# Altium PCB HVSUP_ISOL.PCBDOC (part 1 of 2)
Units mm, origin at the board's own origin, x right, y up, seen from the top; angles counter-clockwise.
Board outline 222.63 x 100.1 mm, 4 copper layers (Top, GP1(GND), L3, Bot), stack 1.648 mm thick; 144 components, 102 nets, 508 pads, 186 vias.
Unrouted connection lines stored in the file: 240.
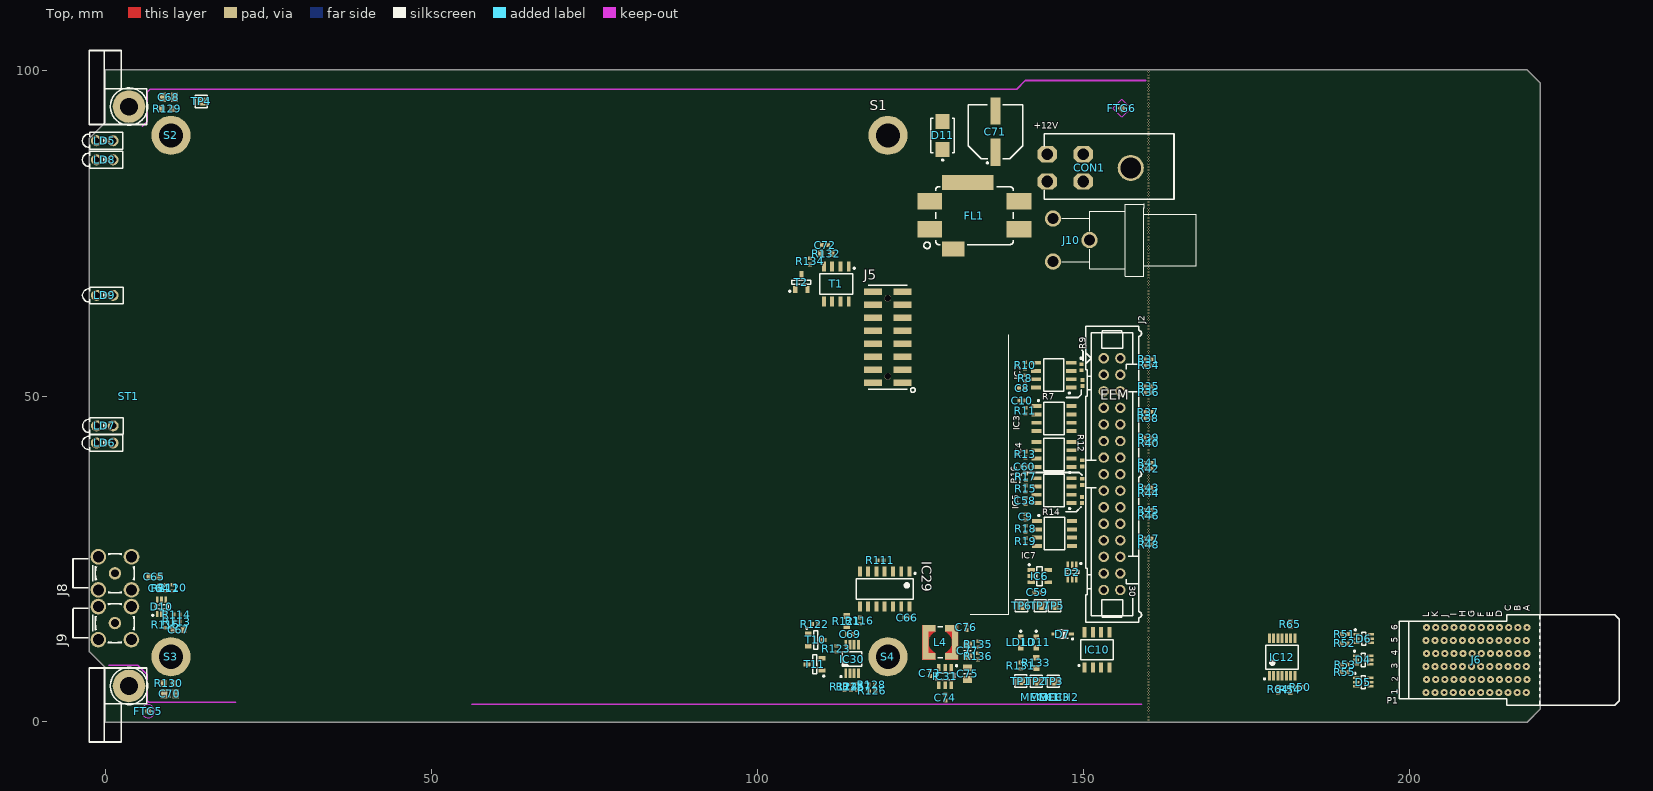
[diagram p0: Top view]
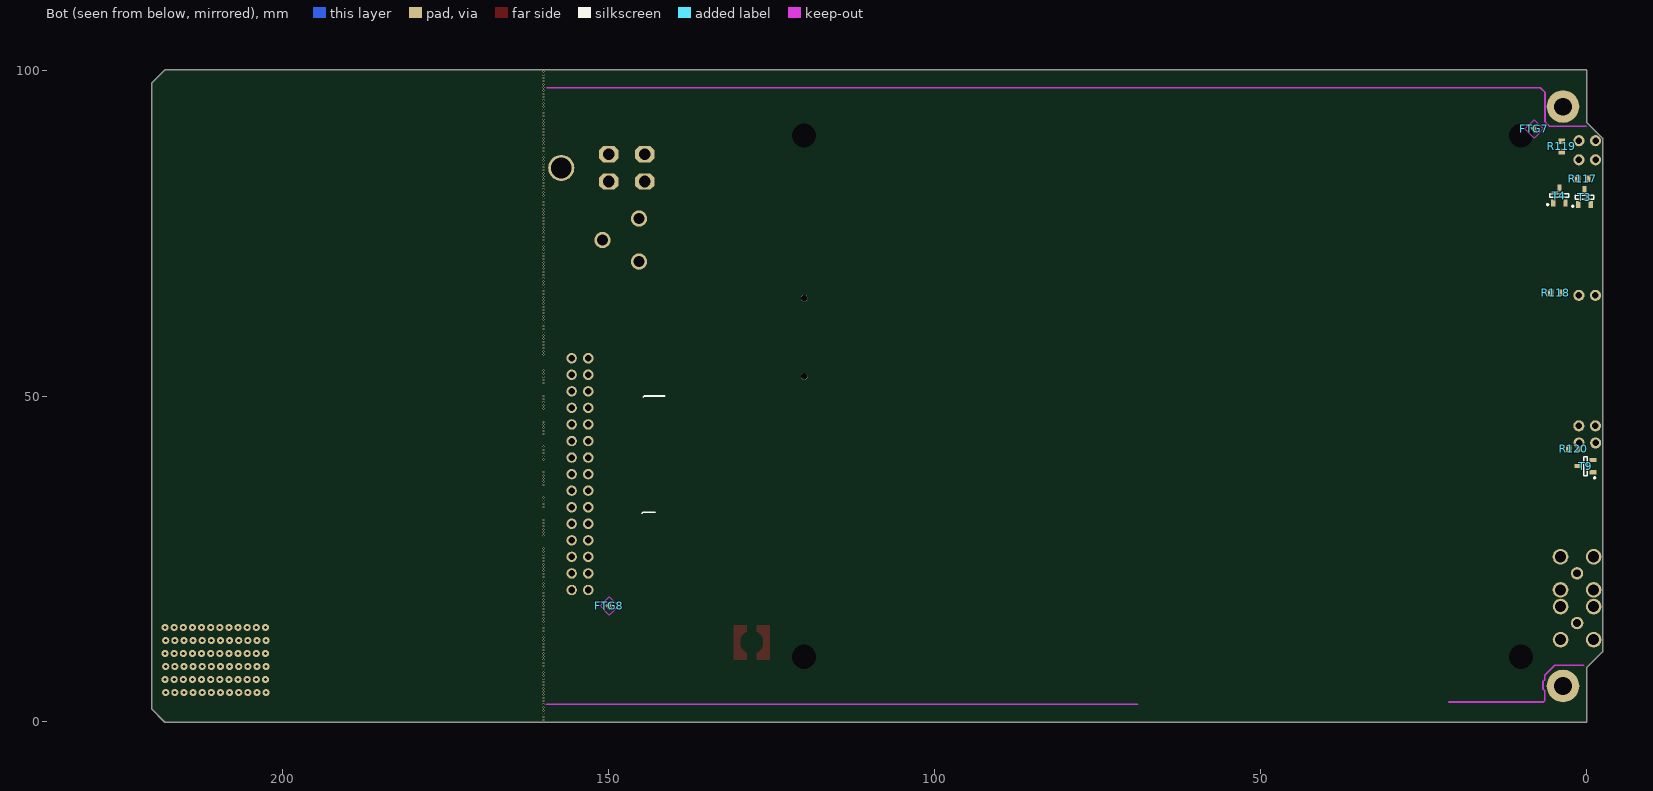
[diagram p1: Bot view, seen from below]
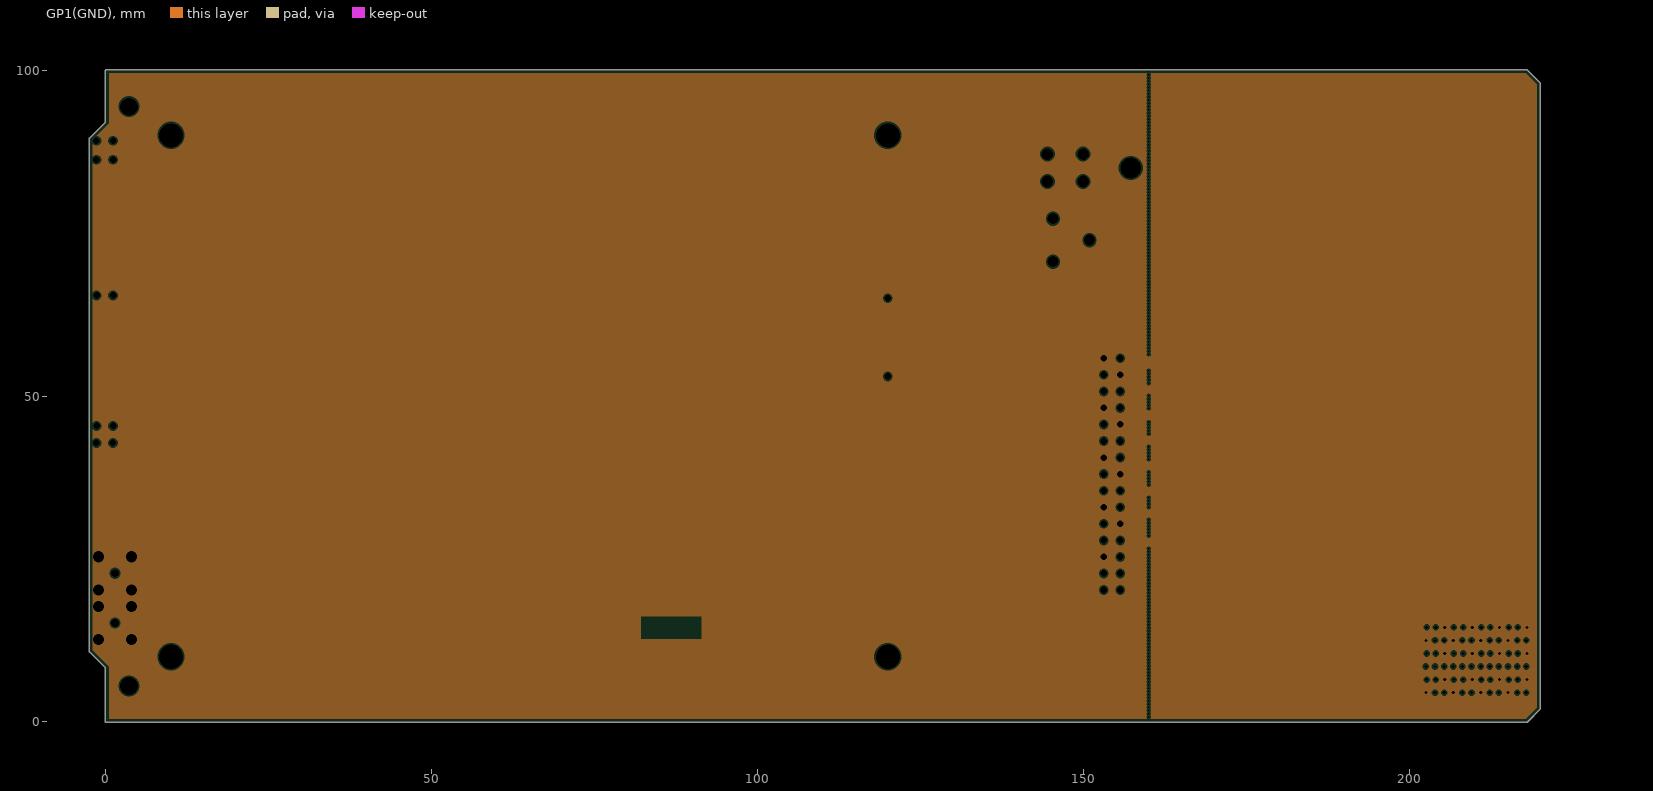
[diagram p2: GP1(GND), clearances drawn from the general rule]

## Layer stack, top to bottom
TopSolder: solder mask 0.0102, Solder Resist, Dk 3.5
Top: signal copper 0.058
Dielectric1: core 0.18, FR-4, Dk 4.2
GP1(GND): plane copper 0.036, net GND
Dielectric 3: prepreg 1.1, FR-4, Dk 4.2
L3: signal copper 0.036
Dielectric2: core 0.18, FR-4, Dk 4.2
Bot: signal copper 0.058
BottomSolder: solder mask 0.0102, Solder Resist, Dk 3.5

## Board outline
-2.54,10.82 -2.54,15.138 cw(c-2.489,15.138) -2.539,15.142 cw(c-2.489,15.145) -2.54,15.145 -2.54,22.645 -2.54,89.511 cw(c-2.489,89.511) -2.525,89.547 -0.05,92.021 -0.05,100 cw(c0,100) 0,100.05 159.99,100.05 cw(c159.995,100) 159.995,100.05 218.037,100.05 cw(c218.039,100) 218.075,100.036 220.074,98.036 cw(c220.039,98) 220.089,98 220.089,2 cw(c220.039,2) 220.074,1.964 218.075,-0.035 cw(c218.039,0) 218.039,-0.05 0,-0.05 cw(c0,0) -0.05,0 -0.05,8.299 -2.525,10.773 cw(c-2.489,10.809) -2.539,10.815 cw(c-2.489,10.82)

## Design rules (kind name [scope] priority, off if disabled: settings)
AcuteAngle [All] p1: minimum=6.00000000000000E+0001 checktracksonly=FALSE
BoardOutlineClearance [not (OnLayer('TopOverlay')  or  OnLayer('BottomOverlay') )] p1: gap=0.254 ignorepadtopadclearanceinfootprint=FALSE except(0: Arc-SplitContinuation Track-SplitContinuation SMDPad-SplitContinuation THPad-SplitContinuation Via-SplitContinuation Fill-SplitContinuation Poly-SplitContinuation Region-SplitContinuation Text-SplitContinuation)
Clearance Clearance_HV [InNetClass('HV') vs not InNetClass('HV')] p1: gap=1 ignorepadtopadclearanceinfootprint=FALSE
Clearance Clearance_balancing [InNamedPolygon('balancing')            or InNamedPolygon('balancing_top')] p2: gap=0.3 ignorepadtopadclearanceinfootprint=FALSE
Clearance Clearance_DIFF [(InDifferentialPairClass('All Differential Pairs'))] p3: gap=0.127 ignorepadtopadclearanceinfootprint=FALSE except(0: Arc-Hole Track-Hole SMDPad-Hole THPad-Hole Via-Hole Fill-Hole Poly-Hole Region-Hole Text-Hole; 0.254: Arc-Poly Track-Poly SMDPad-Poly THPad-Poly Via-Poly Fill-Poly Poly-Poly Poly-Region Poly-Text)
Clearance [All] p4: gap=0.127 ignorepadtopadclearanceinfootprint=FALSE except(0: Arc-Hole Track-Hole SMDPad-Hole THPad-Hole Via-Hole Fill-Hole Poly-Hole Region-Hole Text-Hole; 0.381: Arc-Poly Track-Poly SMDPad-Poly THPad-Poly Via-Poly Fill-Poly Poly-Poly)
ComponentClearance [All] p1 off: gap=0.254 collisioncheckmode=3 verticalgap=0.254 showdistances=FALSE
DiffPairsRouting [All] p1: maxlimit=0.178 minlimit=0.152 mostfreqgap=0.152 toplayer_minwidth=0.127 toplayer_maxwidth=0.152 toplayer_prefwidth=0.152 midlayer1_minwidth=0.127 midlayer1_maxwidth=0.152 midlayer1_prefwidth=0.152 bottomlayer_minwidth=0.127 bottomlayer_maxwidth=0.152 bottomlayer_prefwidth=0.152 maxuncoupledlength=12.7
FabricationTestPointUsage TestPointUsage [All] p1: valid=0 allowmultiple=FALSE
FabricationTestpoint Testpoint [All] p1: side=3 testpointundercomponent=TRUE minsize=1.016 maxsize=2.54 preferedsize=1.524 minholesize=0.508 maxholesize=1.016 preferedholesize=0.813 testpointgrid=0.025 allowsidetop=TRUE allowsidebottom=TRUE usegrid=TRUE gridtolerance=0
Height [All] p1 off: minheight=0 maxheight=25.4 prefheight=12.7
HoleSize [All] p1: absolutevalues=TRUE maxlimit=3.81 minlimit=0.025 maxpercent=80.000 minpercent=20.000
HoleToHoleClearance [All] p1: gap=0.025 allowstackedmicrovias=TRUE
MinimumSolderMaskSliver [All] p1: minsoldermaskwidth=0
PlaneClearance PlaneClearance_HV [InNetClass('HV')] p1: clearance=1
PlaneClearance [All] p2: clearance=0.254
PlaneConnect [All] p1: planeconnectstyle=Direct reliefexpansion=0.508 reliefentries=4 reliefconductorwidth=0.254 reliefairgap=0.254
PolygonConnect PolygonConnect_pad [(InPadClass('All Pads'))] p1: connectstyle=Relief reliefconductorwidth=0.254 reliefentries=4 polygonreliefangle="90 Angle" airgapwidth=0.254
PolygonConnect [All] p2: connectstyle=Direct reliefconductorwidth=0.254 reliefentries=4 polygonreliefangle="45 Angle" airgapwidth=0.254
RoomDefinition HVSUP_ISOL [InComponentClass('HVSUP_ISOL')] p1: confinementstyle=ConfineIn formatcopy=TRUE lockcomponents=FALSE outline -101.6,-152.4 -50.8,-152.4 -50.8,-127 -101.6,-127
RoomDefinition U_DIOT_Connectors [InComponentClass('U_DIOT_Connectors')] p2: confinementstyle=ConfineIn formatcopy=TRUE lockcomponents=FALSE outline 161.149,1.6 336.649,1.6 336.649,10.6 161.149,10.6
RoomDefinition U_Supply_HV_ISOL [InComponentClass('U_Supply_HV_ISOL')] p3: confinementstyle=ConfineIn formatcopy=TRUE lockcomponents=FALSE outline 161.138,126.414 497.004,126.414 497.004,158.265 161.138,158.265
RoomDefinition EEM_connector [InComponentClass('EEM_connector')] p4 off: confinementstyle=ConfineIn formatcopy=TRUE lockcomponents=FALSE outline 145.554,8.308 157.75,8.308 157.75,58.925 145.554,58.925
RoutingVias "Schematic Routing Via Style" [InNetClass('Hpower')] p1: holewidth=0.5 width=0.7 viastyle="Through Hole" minholewidth=0.5 minwidth=0.7 maxholewidth=0.711 maxwidth=1.27
RoutingVias [All] p2: holewidth=0.2 width=0.5 viastyle="Through Hole" minholewidth=0.2 minwidth=0.5 maxholewidth=0.711 maxwidth=1.27
SilkToSilkClearance [All] p1: silktosilkclearance=0
SilkToSolderMaskClearance SilkscreenOverComponentPads [IsPad] p1: minsilkscreentomaskgap=0 clearancetoexposedcopper=TRUE
SolderMaskExpansion [All] p1: expansion=0.051 istentingtop=FALSE
Width "Schematic Width Constraint" [InNetClass('Hpower')] p1: maxlimit=1.27 minlimit=0.381 preferedwidth=0.508
Width Z50R [InNetClass('SPI')] p2: maxlimit=0.298 minlimit=0.221 preferedwidth=0.298 toplayer_minwidth=0.298 midlayer1_maxwidth=0.221 midlayer1_prefwidth=0.221 bottomlayer_minwidth=0.298 impedanceprofiledriven=TRUE minimp=50.000000 maximp=50.000000 favimp=50.000000
Width [All] p3: maxlimit=1.27 minlimit=0.127 preferedwidth=0.127
18 further rules are at their usual default settings.

## Classes and differential pairs
net class BP_IO.LVDS_P[0..7]: BP_IO.LVDS_P0 BP_IO.LVDS_P1 BP_IO.LVDS_P2 BP_IO.LVDS_P3 BP_IO.LVDS_P4 BP_IO.LVDS_P5 BP_IO.LVDS_P6 BP_IO.LVDS_P7
net class BP_IO.LVDS_N[0..7]: BP_IO.LVDS_N0 BP_IO.LVDS_N1 BP_IO.LVDS_N2 BP_IO.LVDS_N3 BP_IO.LVDS_N4 BP_IO.LVDS_N5 BP_IO.LVDS_N6 BP_IO.LVDS_N7
component class U_DIOT_Connectors: D4 D5 D6 IC12 J6 R50 R51 R52 R53 R54 R55 R64 R65
net class Hpower: GNDF P12V0F
component class U_Supply_HV_ISOL: C71 C72 C73 C74 C75 C76 C77 CON1 D7 D11 FL1 IC31 J10 L4 LD10 LD11 R131 R132 R133 R134 R135 R136 T1 T2 TP1 TP2 TP3 TP4
component class EEM_connector: C8 C9 C10 C58 C59 C60 D2 IC2 IC3 IC4 IC5 IC6 IC7 IC10 J2 R7 R8 R9 R10 R11 R12 R13 R14 R15 R16 R17 R18 R19 R31 R34 R35 R36 R37 R38 R39 R40 R41 R42 R43 R44 R45 R46 R47 R48 TP5 TP6 TP7
component class HVSUP_ISOL: C64 C65 C66 C67 C68 C69 C70 D10 FTG5 FTG6 FTG7 FTG8 IC29 IC30 J5 J8 J9 LD5 LD6 LD7 LD8 LD9 MECH1 MECH2 MECH3 R110 R111 R112 R113 R114 R115 R116 R117 R118 R119 R120 R121 R122 R123 R124 R125 R126 R127 R128 R129 R130 S1 S2 S3 S4 ST1 T3 T4 T9 T10 T11
differential pair BP_IO.LVDS4: +BP_IO.LVDS_P4 -BP_IO.LVDS_N4
differential pair BP_IO.LVDS3: +BP_IO.LVDS_P3 -BP_IO.LVDS_N3
differential pair BP_IO.LVDS2: +BP_IO.LVDS_P2 -BP_IO.LVDS_N2
differential pair BP_IO.LVDS1: +BP_IO.LVDS_P1 -BP_IO.LVDS_N1
differential pair BP_IO.LVDS0: +BP_IO.LVDS_P0 -BP_IO.LVDS_N0
differential pair PE_CLK.CLK: +PE_CLK.CLK_P -PE_CLK.CLK_N
differential pair BP_IO.LVDS7: +BP_IO.LVDS_P7 -BP_IO.LVDS_N7
differential pair BP_IO.LVDS6: +BP_IO.LVDS_P6 -BP_IO.LVDS_N6
differential pair BP_IO.LVDS5: +BP_IO.LVDS_P5 -BP_IO.LVDS_N5
differential pair LVDS7: +LVDS7_P -LVDS7_N
differential pair LVDS6: +LVDS6_P -LVDS6_N
differential pair LVDS5: +LVDS5_P -LVDS5_N
differential pair LVDS4: +LVDS4_P -LVDS4_N
differential pair LVDS3: +LVDS3_P -LVDS3_N
differential pair LVDS2: +LVDS2_P -LVDS2_N
differential pair LVDS1: +LVDS1_P -LVDS1_N
differential pair LVDS0: +LVDS0_P -LVDS0_N

## Components (designator, comment, footprint, x,y, rotation, side; value= is the part's Value field where it differs from the comment)
C8 "100nF" CAPC1005X55N 140.576,51.206 r0 top
C9 "100nF" CAPC1005X55N 141.127,31.472 r270 top
C10 "100nF" CAPC1005X55N 140.626,49.296 r0 top
C58 "100nF" CAPC1005X55N 141.086,33.921 r270 top
C59 "100nF" CAPC1005X55N 142.925,19.875 r0 top
C60 "100nF" CAPC1005X55N 140.985,39.176 r0 top
C64 "100nF" CAPC1005X55N 8.2,20.52 r270 top
C65 "Undefined" CAPC1608X90N 7.45,22.275 r0 top
C66 "100nF" CAPC1005X55N 122.975,16 r0 top
C67 "Undefined" CAPC1608X90N 11.175,14.125 r180 top
C68 "Undefined" CAPC2012X135N 9.625,95.85 r0 top
C69 "100nF" CAPC1005X55N 114.2,13.45 r180 top
C70 "Undefined" CAPC2012X135N 9.825,4.314 r0 top
C71 "220uF" CAPAE830X620N 136.5,90.55 r90 top
C72 "1uF" CAPC1005X55N 110.35,73.17 r0 top
C73 "100nF" CAPC1005X55N 126.425,7.47 r90 top
C74 "100nF" CAPC1005X55N 128.801,3.725 r90 top
C75 "22uF" CAPC2012X135N 132.234,7.407 r270 top
C76 "100nF" CAPC1005X55N 132.033,14.536 r270 top
C77 "22uF" CAPC2012X135N 132.234,10.891 r90 top
CON1 "MRX56904CV" MRX56904CV 149.95,87.1 r90 top
D2 "DRTR5V0U4S-7" SOT65P210X110-6N 148.248,23 r270 top
D4 "PESD3V3L5UY" SOT65P210X110-6N 192.9,9.5 r0 top
D5 "PESD3V3L5UY" SOT65P210X110-6N 192.95,6.1 r0 top
D6 "PESD3V3L5UY" SOT65P210X110-6N 193,12.775 r0 top
D7 "BAT165" SOD2512X110N 146.825,13.475 r180 top
D10 "DRTR5V0U4S-7" SOT65P210X110-6N 8.55,17.65 r90 top
D11 "SMBJ15A" DIOM5336X265N 128.4,90 r90 top
FL1 "10A/50VDC" FIL_MURATA_BNX02 133.275,77.675 r180 top
FTG5 "Use only in PCB" FIDUCIAL_TOP_C100-200 6.5,1.646 r90 top
FTG6 "Use only in PCB" FIDUCIAL_TOP_S100-200 155.9,94.15 r90 top
FTG7 "Use only in PCB" FIDUCIAL_TOP_S100-200 8,91 r90 bottom
FTG8 "Use only in PCB" FIDUCIAL_TOP_S100-200 149.86,17.805 r90 bottom
IC2 "FIN1028MX" SOIC127P600X175-8N 145.432,53.206 r180 top
IC3 "FIN1027AMX" SOIC127P600X175-8N 145.483,46.541 r0 top
IC4 "FIN1028MX" SOIC127P600X175-8N 145.493,41.041 r180 top
IC5 "FIN1028MX" SOIC127P600X175-8N 145.483,35.485 r180 top
IC6 "24AA02E48T-I/OT" SOT95P280X145-5N 143.284,22.375 r0 top
IC7 "FIN1027AMX" SOIC127P600X175-8N 145.543,28.906 r0 top
IC10 "24AA025E48-I/SN" SOIC127P600X175-8N 152.075,11.05 r90 top
IC12 "74HC4066PW" SOP65P640X110-14N 180.475,9.95 r90 top
IC29 "SN74LVC14AD" SOIC127P600X175-14N 119.5,20.4 r270 top
IC30 "LM75AIMM/NOPB" SOP65P490X109-8N 114.5,9.65 r90 top
IC31 "AP62201WU-7" SOT95P280X100-6N 128.776,6.97 r270 top
J2 "IDC" 3M_N2530-6002RB 154.384,38.018 r270 top locked
J5 "PLMTD16S-CT or 87759-1650" 87759-1650 119.964,59.004 r90 top locked
J6 "P1" AMPHENOL_10052825-101LF 210.289,9.5 r90 top locked
J8 "MCX" AMPHENOL_919-383J-51A 1.4,22.8 r180 top
J9 "MCX" AMPHENOL_919-383J-51A 1.39,15.16 r180 top
J10 "Jack" SWITCHCRAFT_L712RA 145.325,70.625 r180 top
L4 "3.3uH" IND_WURTH_WE-TPC_4828 128.026,12.207 r0 top
LD5 "Green" LED_DIALIGHT_555-230 -1.436,89.169 r0 top
LD6 "Green" LED_DIALIGHT_555-230 -1.45,42.8 r0 top
LD7 "Red" LED_DIALIGHT_555-200 -1.415,45.425 r0 top
LD8 "Green" LED_DIALIGHT_555-230 -1.436,86.25 r0 top
LD9 "Green" LED_DIALIGHT_555-230 -1.424,65.445 r0 top
LD10 "Green" LED_KINGBRIGHT_KPH-1608CGCK 140.375,12.214 r270 top
LD11 "Green" LED_KINGBRIGHT_KPH-1608CGCK 142.75,12.214 r270 top
MECH1 "R317580000" GENERIC_MECH 143.479,3.822 r90 top
MECH2 "R317580000" GENERIC_MECH 146.273,3.782 r90 top
MECH3 "R317580000" GENERIC_MECH 144.876,3.782 r90 top
R7 "100" RESC1005X40N 149.86,51.999 r90 top
R8 "100" RESC1005X40N 141.035,52.706 r270 top
R9 "100" RESC1005X40N 149.732,54.413 r90 top
R10 "100" RESC1005X40N 141.035,54.706 r270 top
R11 "100" RESC1005X40N 141.086,47.741 r270 top
R12 "100" RESC1005X40N 149.811,39.676 r90 top
R13 "100" RESC1005X40N 141.086,41.041 r270 top
R14 "100" RESC1005X40N 149.783,34.041 r90 top
R15 "100" RESC1005X40N 141.126,35.798 r270 top
R16 "100" RESC1005X40N 149.811,36.835 r90 top
R17 "1k" RESC1005X40N 141.151,37.605 r270 top
R18 "100" RESC1005X40N 141.111,29.614 r270 top
R19 "100" RESC1005X40N 141.111,27.742 r90 top
R31 "0" RESC1005X40N 159.995,55.616 r0 top
R34 "0" RESC1005X40N 159.995,54.706 r0 top
R35 "0" RESC1005X40N 159.995,51.481 r0 top
R36 "0" RESC1005X40N 159.995,50.575 r0 top
R37 "0" RESC1005X40N 159.975,47.525 r0 top
R38 "0" RESC1005X40N 159.975,46.6 r0 top
R39 "0" RESC1005X40N 160,43.625 r0 top
R40 "0" RESC1005X40N 160,42.75 r0 top
R41 "0" RESC1005X40N 159.995,39.75 r0 top
R42 "0" RESC1005X40N 160,38.875 r0 top
R43 "0" RESC1005X40N 160,35.925 r0 top
R44 "0" RESC1005X40N 160,35.05 r0 top
R45 "0" RESC1005X40N 160,32.5 r0 top
R46 "0" RESC1005X40N 160,31.625 r0 top
R47 "0" RESC1005X40N 160,28.1 r0 top
R48 "0" RESC1005X40N 160,27.2 r0 top
R50 "200" RESC1005X40N 183.295,5.35 r180 top
R51 "22" RESC1005X40N 190.125,13.475 r0 top
R52 "22" RESC1005X40N 190.05,12.05 r0 top
R53 "22" RESC1005X40N 190.145,8.8 r0 top
R54 "22" RESC1005X40N 181.725,4.925 r270 top
R55 "22" RESC1005X40N 190.05,7.625 r0 top
R64 "10k" RESC1005X40N 179.85,5 r270 top
R65 "10k" RESC1005X40N 181.725,15 r90 top
R110 "51" RESC1005X40N 10.265,20.575 r90 top
R111 "51" RESC1005X40N 118.85,24.775 r0 top
R112 "51" RESC1005X40N 9.175,20.52 r270 top
R113 "51" RESC1005X40N 10.875,15.38 r0 top
R114 "10k" RESC1005X40N 10.875,16.45 r180 top
R115 "51" RESC1005X40N 9.175,14.91 r90 top
R116 "100" RESC1005X40N 115.69,15.54 r270 top
R117 "220" RESC1608X55N 0.55,83.35 r180 bottom
R118 "220" RESC1608X55N 4.659,65.85 r0 bottom
R119 "220" RESC1608X55N 3.759,88.294 r270 bottom
R120 "220" RESC1608X55N 1.875,41.875 r0 bottom
R121 "220" RESC1608X55N 113.65,15.475 r90 top
R122 "10k" RESC1005X40N 108.8,15 r180 top
R123 "10k" RESC1005X40N 112.075,11.22 r270 top
R124 "10k" RESC1005X40N 113.325,5.375 r270 top
R125 "10k" RESC1005X40N 114.3,5.375 r270 top
R126 "0" RESC1005X40N 117.6,4.75 r180 top
R127 "0" RESC1005X40N 115.275,5.375 r270 top
R128 "0" RESC1005X40N 117.52,5.7 r180 top
R129 "0" RESC1608X55N 9.414,94.075 r180 top
R130 "0" RESC1608X55N 9.675,5.95 r180 top
R131 "10k" RESC1005X40N 140.375,8.641 r270 top
R132 "100k" RESC1608X55N 110.525,71.845 r0 top
R133 "1k" RESC1608X55N 142.75,9.046 r90 top
R134 "10k" RESC1005X40N 108.075,70.67 r90 top
R135 "31k6" RESC1005X35N 133.858,11.909 r90 top
R136 "10k" RESC1005X40N 133.834,10.064 r90 top
S1 "9774030151" 9774030151 120,90 r0 top locked
S2 "9774030151" 9774030151 10,90 r0 top locked
S3 "9774030151" 9774030151 10,10 r0 top locked
S4 "9774030151" 9774030151 120,10 r0 top locked
ST1 "SCHROFF_PANEL_3U_4HP" SCHROFF_PANEL_3HP_4U 3.556,5.512 r0 top locked
T1 "SI4425DDY-T1-GE3" SOIC127P600X175-8N 112.075,67.195 r270 top
T2 "BSS138LT1G" SOT95P240X110-3N 106.725,67.47 r90 top
T3 "BSS138LT1G" SOT95P240X110-3N 0.254,80.512 r90 bottom
T4 "BSS138LT1G" SOT95P240X110-3N 4.109,80.762 r90 bottom
T9 "BSS138LT1G" SOT95P240X110-3N 0.1,39.25 r0 bottom
T10 "BSS138LT1G" SOT95P240X110-3N 108.925,12.575 r0 top
T11 "BSS138LT1G" SOT95P240X110-3N 108.75,8.825 r180 top
TP1 "Test Point" TPS127 140.375,6.275 r0 top
TP2 "Test Point" TPS127 142.75,6.244 r90 top
TP3 "Test Point" TPS127 145.359,6.244 r90 top
TP4 "Test Point" TPS127 14.65,95.2 r90 top
TP5 "Test Point" TPS127 145.543,17.805 r0 top
TP6 "Test Point" TPS127 140.496,17.805 r0 top
TP7 "Test Point" TPS127 143.384,17.805 r0 top

## Footprints (in the part's own frame and the unit in brackets; to place one, negate y for a bottom-side part, rotate by r counter-clockwise, add the part's x,y. Pads: shape width x height; smd on the part's side, far side on the other; paste and mask are expansions set on the pad)
3M_N2530-6002RB [mm] "30 Contacts - Straight .100\" x .100\" Low Profile Four-Wall Header"
  round 1.6 hole 1: 1(-17.78,-1.27) 2(-17.78,1.27) 3(-15.24,-1.27) 4(-15.24,1.27) 5(-12.7,-1.27) 6(-12.7,1.27) 7(-10.16,-1.27) 8(-10.16,1.27) 9(-7.62,-1.27) 10(-7.62,1.27) 11(-5.08,-1.27) 12(-5.08,1.27) 13(-2.54,-1.27) 14(-2.54,1.27) 15(0,-1.27) 16(0,1.27) 17(2.54,-1.27) 18(2.54,1.27) 19(5.08,-1.27) 20(5.08,1.27) 21(7.62,-1.27) 22(7.62,1.27) 23(10.16,-1.27) 24(10.16,1.27) 25(12.7,-1.27) 26(12.7,1.27) 27(15.24,-1.27) 28(15.24,1.27) 29(17.78,-1.27) 30(17.78,1.27)
  silkscreen extent -22.71,-4.85 22.71,4.52, body extent -22.71,-4.11 22.71,4.52, height 9.91
87759-1650 [mm] "2mm pin header"
  rect 1x2.75 smd: 1(-7,-2.25) 2(-7,2.25) 3(-5,-2.25) 4(-5,2.25) 5(-3,-2.25) 6(-3,2.25) 7(-1,-2.25) 8(-1,2.25) 9(1,-2.25) 10(1,2.25) 11(3,-2.25) 12(3,2.25) 13(5,-2.25) 14(5,2.25) 15(7,-2.25) 16(7,2.25)
  round 1 hole 1 unplated: ""(-6,0) ""(6,0)
  silkscreen extent -8.44,-4.22 8,3, body extent -8,-2.75 7.9,2.75, height 6.55
9774030151 [mm] "SMD Steel Spacer with internal Thread"
  round 6 smd paste-2539.97: 1(0,0)
  round 0 hole 3.7 unplated: ""(0,0)
  body extent -2.55,-2.54 2.53,2.55, height 3
AMPHENOL_919-383J-51A [mm] "50 Ohm, RF Connector, MCX Right Angle PCB Receptacle Jack"
  round 1.9 hole 1.2: 1(0,0)
  round 2.4 hole 1.7: 2(-2.54,2.54) 2(-2.54,-2.54) 2(2.54,2.54) 2(2.54,-2.54)
  silkscreen extent -3,-3 6.5,3, body extent -3,-3 6.5,3, height 6
AMPHENOL_10052825-101LF [mm] "72 Contacts, 2mm Pitch, 6 Columns, 4 Pairs per Column, 4 Walls, Right Angle Header"
  round 1.1 hole 0.5: A1(-5,-7.65) A2(-3,-7.75) A3(-1,-7.65) A4(1,-7.75) A5(3,-7.65) A6(5,-7.75) B1(-5,-6.25) B2(-3,-6.35) B3(-1,-6.25) B4(1,-6.35) B5(3,-6.25) B6(5,-6.35) C1(-5,-4.85) C2(-3,-4.95) C3(-1,-4.85) C4(1,-4.95) C5(3,-4.85) C6(5,-4.95) D1(-5,-3.45) D2(-3,-3.55) D3(-1,-3.45) D4(1,-3.55) D5(3,-3.45) D6(5,-3.55) E1(-5,-2.05) E2(-3,-2.15) E3(-1,-2.05) E4(1,-2.15) E5(3,-2.05) E6(5,-2.15) F1(-5,-0.65) F2(-3,-0.75) F3(-1,-0.65) F4(1,-0.75) F5(3,-0.65) F6(5,-0.75) G1(-5,0.75) G2(-3,0.65) G3(-1,0.75) G4(1,0.65) G5(3,0.75) G6(5,0.65) H1(-5,2.15) H2(-3,2.05) H3(-1,2.15) H4(1,2.05) H5(3,2.15) H6(5,2.05) I1(-5,3.55) I2(-3,3.45) I3(-1,3.55) I4(1,3.45) I5(3,3.55) I6(5,3.45) J1(-5,4.95) J2(-3,4.85) J3(-1,4.95) J4(1,4.85) J5(3,4.95) J6(5,4.85) K1(-5,6.35) K2(-3,6.25) K3(-1,6.35) K4(1,6.25) K5(3,6.35) K6(5,6.25) L1(-5,7.75) L2(-3,7.65) L3(-1,7.75) L4(1,7.65) L5(3,7.75) L6(5,7.65)
  silkscreen extent -6.95,-21.95 6.95,11.85, body extent -6.95,-21.95 6.95,11.85, height 15.25
CAPAE830X620N [mm] "Capacitor, Aluminium Electrolytric, 8.3mm L X 8.3mm W X 6.2mm H, IPC Medium Density"
  rect 4.15x1.6 smd: 1(-3.15,0) 2(3.15,0)
  silkscreen extent -4.9,-4.15 4.15,4.15, body extent -4.75,-4.25 4.75,4.25, height 6.2
CAPC1005X55N [mm] "Capacitor, Non-Polarized, Chip; 1.00mm L X 0.50mm W X 0.70mm H, IPC Medium Density"
  rect 0.62x0.62 smd: 1(-0.45,0) 2(0.45,0)
  body extent -0.52,-0.27 0.53,0.28, height 0.55
CAPC1608X90N [mm] "Chip Capacitor, Body 1.6x0.8mm IPC Medium Density"
  rect 0.95x0.95 smd: 1(-0.75,0) 2(0.75,0)
  body extent -0.85,-0.45 0.85,0.45, height 0.9
CAPC2012X135N [mm] "Chip Capacitor, Body 2.0x1.25mm, IPC Medium Density"
  rect 1.05x1.4 smd: 1(-0.9,0) 2(0.9,0)
  silkscreen extent 0,-0.58 0,0.58, body extent -1.05,-0.67 1.05,0.68, height 1.25
DIOM5336X265N [mm] "DO-214-AA/SMB Diode, Molded Body; 5.34mm L X 3.625mm W X 2.65mm H, IPC Medium Density"
  rect 2.3x2.15 smd: 1(-2.15,0) 2(2.15,0)
  silkscreen extent -3.92,-1.8 2.65,1.8, body extent -2.7,-1.95 2.7,1.95, height 2.4
FIDUCIAL_TOP_C100-200 [mm] "Round Fiducial Target, Top Layer, 1.0mm, Top Solder 2.0mm, Keepout =2.0mm"
  round 1 smd paste-0.51 mask+0.5: FTG2(0,0)
  Top keep-out circle w0.1: c0,0 r1
FIDUCIAL_TOP_S100-200 [mm] "Square Fiducial Target, Top Layer, 1.0mm, Top Solder 2.0mm, Keepout =2.0mm"
  rect 1x1 smd rot 45 paste-0.51 mask+0.5: 1(0,0)
  Top keep-out region: 1.414,0 0,-1.414 -1.414,0 0,1.414
FIL_MURATA_BNX02 [mm] "Block Type EMIFIL LC Combined Type, BNX02* Series"
  rect 3.8x2.5 smd: 1(-6.85,2.1) 2(6.85,2.1) 3(-6.85,-2.2) 4(6.85,-2.2)
  rect 7.9x2.3 smd: 4(1,-5.1)
  rect 3.4x2.3 smd: 4(3.25,5.1)
  silkscreen extent -5.95,-4.45 7.77,5.05, body extent -6.05,-4.55 6.05,4.55, height 3.1
GENERIC_MECH [mm]
IND_WURTH_WE-TPC_4828 [mm] "Shielded Tiny Power Inductor, Body 4.8x4.8mm"
  rect 0.95x5.3 smd: 1(-2.275,0) 2(2.275,0)
  rect 1.05x1.014 smd: 1(-1.275,-2.143) 1(-1.275,2.143) 2(1.275,-2.143) 2(1.275,2.143)
  Top region: 0.75,-2.65 2.75,-2.65 2.75,2.65 0.75,2.65 0.75,1.636 1.394,1.138 1.753,0.407 1.753,-0.407 1.394,-1.138 0.75,-1.636 0.75,-1.636
  Top region: -2.75,-2.65 -0.75,-2.65 -0.75,-1.636 -1.394,-1.138 -1.753,-0.407 -1.753,0.407 -1.394,1.138 -0.75,1.636 -0.75,1.636 -0.75,2.65 -2.75,2.65
  Top region: 2.75,-2.65 0.75,-2.65 0.75,-1.636 1.394,-1.138 1.753,-0.407 1.753,0.407 1.394,1.138 0.75,1.636 0.75,1.636 0.75,2.65 2.75,2.65
  silkscreen extent -0.35,-2.4 0.35,2.4, body extent -2.4,-2.4 2.4,2.4, height 2.8
LED_DIALIGHT_555-200 [mm] "Single 2mm Red LED, Body 5.08x2.54mm, Pin spacing 2.54mm"
  round 1.7 hole 1: 1(2.54,0) 2(0,0)
  silkscreen extent -2.16,-1.27 4.06,1.27, body extent -2.16,-1.27 4.06,1.27, height 6.35
LED_DIALIGHT_555-230 [mm] "Single 2mm Green LED, Body 5.08x2.54mm, Pin spacing 2.54mm"
  round 1.7 hole 1: 1(2.54,0) 2(0,0)
  silkscreen extent -2.16,-1.27 4.06,1.27, body extent -2.16,-1.27 4.06,1.27, height 6.35
LED_KINGBRIGHT_KPH-1608CGCK [mm] "SMT Green LED, Case 0603, Body L 1.6 x W 0.8mm H 0.65mm"
  rect 0.8x0.8 smd: 1(-0.825,0) 2(0.825,0)
  silkscreen extent -1.82,-0.4 0.08,0.4, body extent -0.8,-0.4 0.8,0.4, height 0.65
MRX56904CV [mm]
  oct 2.5x3 hole 1.8: 1(0,0) 2(-4.2,0) 3(0,5.5) 4(-4.2,5.5)
  round 4 hole 3.2: 9(-2.1,-7.3)
  silkscreen extent -6.88,-13.94 3.12,5.99, body extent -6.88,-14.02 3.12,5.92, height 11.4
RESC1005X35N [mm] "Chip Resistor, EIA 0402, Metric 1005, Body 1.0x0.5mm, IPC Medium Density"
  rect 0.58x0.62 smd: 1(-0.47,0) 2(0.47,0)
  body extent -0.52,-0.27 0.53,0.28, height 0.35
RESC1005X40N [mm] "Chip Resistor, EIA 0402, Metric 1005, Body 1.0x0.5mm, IPC Medium Density"
  rect 0.58x0.62 smd: 1(-0.47,0) 2(0.47,0)
  body extent -0.52,-0.27 0.53,0.28, height 0.4
RESC1608X55N [mm] "Chip Resistor, EIA 0603, Metric 1608, Body 1.6x0.8mm, IPC Medium Density"
  rect 0.9x1 smd: 1(-0.8,0) 2(0.8,0)
  body extent -0.87,-0.47 0.88,0.48, height 0.55
SCHROFF_PANEL_3HP_4U [mm] "Schroff PCB 3HP 4U Eurocard Panel Kit"
  round 5 hole 2.7: 0(0,0) 1(0,88.9)
  silkscreen extent -6.1,-8.6 2.75,97.5
SOD2512X110N [mm] "Small Outline Diode (SOD-323), 1.70mm W X 1.25mm L X 1.10mm H body,  IPC Medium Density"
  rect 0.9x0.5 smd: 1(-1.3,0) 2(1.3,0)
  silkscreen extent -1.63,-0.65 0.85,0.87, body extent -1.35,-0.67 1.35,0.68, height 1.1
SOIC127P600X175-8N [mm] "SOIC 8, Pitch 1.27mm - Body 4x5mm, IPC Medium Density"
  rect 1.55x0.6 smd: 1(-2.7,1.905) 2(-2.7,0.635) 3(-2.7,-0.635) 4(-2.7,-1.905) 5(2.7,-1.905) 6(2.7,-0.635) 7(2.7,0.635) 8(2.7,1.905)
  silkscreen extent -2.53,-2.5 1.55,2.88, body extent -3.1,-2.5 3.1,2.5, height 1.75
SOIC127P600X175-14N [mm] "SOIC 14, Pitch 1.27mm - Body 4x8.75mm, IPC Medium Density"
  rect 1.55x0.6 smd: 1(-2.7,3.81) 2(-2.7,2.54) 3(-2.7,1.27) 4(-2.7,0) 5(-2.7,-1.27) 6(-2.7,-2.54) 7(-2.7,-3.81) 8(2.7,-3.81) 9(2.7,-2.54) 10(2.7,-1.27) 11(2.7,0) 12(2.7,1.27) 13(2.7,2.54) 14(2.7,3.81)
  silkscreen extent -2.52,-4.4 1.55,4.79, body extent -3.1,-4.37 3.1,4.38, height 1.75
SOP65P490X109-8N [mm] "SOP, 0.65mm pitch; 8 pin,3.00mm W X 3.00mm L X 1.09mm H bodyI, PC Medium Density"
  rect 1.5x0.45 smd: 1(-2.2,0.975) 2(-2.2,0.325) 3(-2.2,-0.325) 4(-2.2,-0.975) 5(2.2,-0.975) 6(2.2,-0.325) 7(2.2,0.325) 8(2.2,0.975)
  silkscreen extent -2.82,-1.5 1.12,1.82, body extent -2.45,-1.55 2.45,1.55, height 1.09
SOP65P640X110-14N [mm] "SOP, 14-Leads, Body 4.4x5mm (max), Pitch 0.65mm, IPC Medium Density"
  rect 1.45x0.45 smd: 1(-2.9,1.95) 2(-2.9,1.3) 3(-2.9,0.65) 4(-2.9,0) 5(-2.9,-0.65) 6(-2.9,-1.3) 7(-2.9,-1.95) 8(2.9,-1.95) 9(2.9,-1.3) 10(2.9,-0.65) 11(2.9,0) 12(2.9,0.65) 13(2.9,1.3) 14(2.9,1.95)
  silkscreen extent -3.47,-2.5 1.85,2.82, body extent -3.12,-2.55 3.12,2.55, height 1.1
SOT65P210X110-6N [mm] "SOT363, SC70-6, SOT, 0.65mm Pitch, 6 Pin, 1.25mm W X 2.00mm L X 1.10mm H, IPC Medium Density"
  rect 0.95x0.4 smd: 1(-1.1,0.65) 2(-1.1,0) 3(-1.1,-0.65) 4(1.1,-0.65) 5(1.1,0) 6(1.1,0.65)
  silkscreen extent -1.42,-1 0.3,1.48, body extent -1.2,-1.1 1.2,1.1, height 1.1
SOT95P240X110-3N [mm] "SOT23 3-Leads, Pitch 0.95mm, Body 1.3x2.9mm, IPC Medium Density"
  rect 1.05x0.65 smd: 1(-1.15,0.95) 2(-1.15,-0.95) 3(1.15,0)
  silkscreen extent -1.52,-1.45 0.3,1.92, body extent -1.25,-1.5 1.25,1.5, height 1.1
SOT95P280X100-6N [mm] "SOT23, 0.95mm pitch; 6 pin, 1.625mm W X 2.90mm L X 1.00mm H body, IPC Medium Density"
  rect 1.1x0.55 smd: 1(-1.35,0.95) 2(-1.35,0) 3(-1.35,-0.95) 4(1.35,-0.95) 5(1.35,0) 6(1.35,0.95)
  silkscreen extent -1.77,-1.45 0.48,1.88, body extent -1.4,-1.5 1.4,1.5, height 1
SOT95P280X145-5N [mm] "SOT, 0.95mm pitch; 5 pin, 1.60mm W X 2.90mm L X 1.45mm H body, IPC Medium Density"
  rect 1.1x0.6 smd: 1(-1.3,0.95) 2(-1.3,0) 3(-1.3,-0.95) 4(1.3,-0.95) 5(1.3,0.95)
  silkscreen extent -1.72,-1.45 0.43,1.87, body extent -1.4,-1.5 1.4,1.5, height 1.45
SWITCHCRAFT_L712RA [mm] "CONN PWR JACK 2.5X5.5MM SOLDER"
  round 2.5 hole 1.7: 1(-5.6,-3.3) 2(0,-6.6) 3(0,0)
  silkscreen extent -22,-8.84 -1.32,2.21, body extent -22,-8.84 1.35,2.18, height 13.9
TPS127 [mm] "1.27 x  1.27mm SMD Test Point Area"
  rect 1.27x1.27 smd paste-1.27: 1(0,0)
  silkscreen extent -0.94,-0.94 0.94,0.94

## Part data
C8 C9 C10 C58 C59 C60 C69 C73 C74 C76: library part CC0402_100NF_16V_10%_X5R, "Non-polarised capacitor", Case=0402, Manufacturer=GENERIC, Manufacturer1 ComponentHeight=0.55mm, Manufacturer1 Example=MURATA, Manufacturer1 Part Number=GRM155R61C104KA88D, Tolerance=±10%, Voltage=16V, Author="CERN DEM JLC", Component Type=Standard, CreateDate=10.12.2013, HelpURL=\\cern.ch\dfs\Applications\Altium\Datasheets\CC0402_X5R_MURATA_GRM.pdf, LatestRevisionDate=10.12.2013, Manufacturer Part Number=CC0402_100NF_16V_10%_X5R, Mounted=Yes, Part Description="SMD Multilayer Chip Ceramic Capacitor", Part Number=CC0402_100NF_16V_10%_X5R, Pin Count=2, Sense=No, SMD=Yes, Socket=No, Status=None, TC=X5R
C64 C66: library part CC0402_100NF_16V_10%_X7R, "Non-polarised capacitor", Case=0402, Manufacturer=GENERIC, Manufacturer1 ComponentHeight=0.55mm, Manufacturer1 Example=MURATA, Manufacturer1 Part Number=GRM155R71C104KA88D, Tolerance=±10%, Voltage=16V, Author="CERN DEM JLC", Component Type=Standard, CreateDate=05.12.2013, HelpURL=\\cern.ch\dfs\Applications\Altium\Datasheets\CC0402_X7R_MURATA_GRM.pdf, LatestRevisionDate=03.12.2007, Manufacturer Part Number=CC0402_100NF_16V_10%_X7R, Mounted=Yes, Part Description="SMD Multilayer Chip Ceramic Capacitor", Part Number=CC0402_100NF_16V_10%_X7R, Pin Count=2, Sense=No, SMD=Yes, Socket=No, Status="Not Recommended", TC=X7R
C65 C67: library part CC0603_NO-VALUE, "Non-polarised capacitor", Case=0603, Manufacturer1 ComponentHeight=0.9mm, Author="CERN DEM MR", Component Type=Standard, CreateDate=22.11.2016, HelpURL=Undefined, LatestRevisionDate=22.11.2016, Manufacturer=Undefined, Manufacturer Part Number=CC0603_NO-VALUE, Mounted=No, Part Description="Reserved Footprint For 0603(1608) Chip Ceramic Capacitor", Part Number=CC0603_NO-VALUE, Pin Count=2, Sense=No, SMD=Yes, Socket=No, Status=None
C68 C70: library part CC0805_NO-VALUE, "Non-polarised capacitor", Case=0805, Manufacturer1 ComponentHeight=1.35mm, Author="CERN DEM JLC", Component Type=Standard, CreateDate=10.12.2008, HelpURL=Undefined, LatestRevisionDate=11.09.2013, Manufacturer=Undefined, Manufacturer Part Number=CC0805_NO-VALUE, Mounted=No, Part Description="Reserved Footprint For 0805(2012) Chip Ceramic Capacitor", Part Number=CC0805_NO-VALUE, Pin Count=2, Sense=No, SMD=Yes, Socket=No, Status=None
C71: library part CAE830-620_220UF_16V_20%, "Polarised capacitor", Case=E, Manufacturer=PANASONIC, Manufacturer Part Number=EEEFK1C221AP, Tolerance=±20%, Voltage=16V, Author="CERN DEM JLC", Component Type=Standard, ComponentHeight=6.2mm, CreateDate=03.12.2007, HelpURL=\\cern.ch\dfs\Applications\Altium\Datasheets\CAE_PANASONIC_FK.pdf, LatestRevisionDate=05.11.2014, Mounted=Yes, Part Description="Aluminum Electrolytic SMT Capacitor", Part Number=CAE830-620_220UF_16V_20%, Pin Count=2, Sense=No, SMD=Yes, Socket=No, Status="Not Recommended"
C72: library part CC0402_1UF_16V_10%_X5R, "Non-polarised capacitor", Case=0402, Manufacturer=GENERIC, Manufacturer1 ComponentHeight=0.55mm, Manufacturer1 Example=TDK, Manufacturer1 Part Number=C1005X5R1C105KT, Tolerance=±10%, Voltage=16V, Author="CERN DEM JLC", Component Type=Standard, CreateDate=2012-10-25, HelpURL=\\cern.ch\dfs\Applications\Altium\Datasheets\CC0402_X5R_TDK_C.pdf, LatestRevisionDate=2012-10-25, Manufacturer Part Number=CC0402_1UF_16V_10%_X5R, Mounted=Yes, Part Description="SMD Multilayer Chip Ceramic Capacitor", Part Number=CC0402_1UF_16V_10%_X5R, Pin Count=2, Sense=No, SMD=Yes, Socket=No, Status=Preferred, TC=X5R
C75 C77: library part CC0805_22UF_16V_10%_X5R, "Non-polarised capacitor", Case=0805, Manufacturer=GENERIC, Manufacturer1 ComponentHeight=1.35mm, Manufacturer1 Example=TDK, Manufacturer1 Part Number=C2012X5R1C226KT, Tolerance=±10%, Voltage=16V, Author="CERN DEM JLC", Component Type=Standard, CreateDate=25.10.2012, HelpURL=\\cern.ch\dfs\Applications\Altium\Datasheets\CC0805_X5R_TDK_C.pdf, LatestRevisionDate=25.10.2012, Manufacturer Part Number=CC0805_22UF_16V_10%_X5R, Mounted=Yes, Part Description="SMD Multilayer Chip Ceramic Capacitor", Part Number=CC0805_22UF_16V_10%_X5R, Pin Count=2, Sense=No, SMD=Yes, Socket=No, Status=Preferred, TC=X5R
CON1: library part CON_CRIMP_4.2mm_RA_4, "4.2mm cripm terminal header"
D2 D10: library part D_TVS_DRTR5V0U4S-7, "Integrated Quad Ultra-Low Capacitance ESD Protection", Case=SOT363, Manufacturer=DIODES, Author=GK, Bonding=No, Component Type=Standard, ComponentHeight=1.1mm, CreateDate=24.01.2017, Device=DRTR5V0U4S-7, HelpURL=\\cern.ch\dfs\Applications\Altium\Datasheets\PRTR5V0U4Y.pdf, LatestRevisionDate=14.09.2020, Manufacturer Part Number=DRTR5V0U4S-7, Mounted=Yes, PackageDescription="SOT363, SC70-6, 0.65mm Pitch; 6 Pin, 1.25mm W X 2.00mm L X 1.10mm H body, IPC Medium Density", Part Description="Integrated Quad Ultra-Low Capacitance ESD (±8kV) Protection", Part Number=DRTR5V0U4S-7, Pin Count=6, PressFit=No, Sense=No, SMD=Yes, Socket=No, Status=Active, Status Comment=Active
D4 D5 D6: "Fivefold ESD Protection Diode Arrays", Case=SOT363, Manufacturer=NEXPERIA, Power=200W, Voltage=3.3V, Author="CERN DEM WB", Bonding=No, Component Type=Standard, ComponentHeight=1.1mm, CreateDate=05.07.2021, Device=PESD3V3L5UY, HelpURL=\\cern.ch\dfs\Applications\Altium\Datasheets\PESD3V3L5UY.pdf, LatestRevisionDate=05.07.2021, Manufacturer Part Number=PESD3V3L5UY, Mounted=Yes, PackageDescription="SOT363, SC-88, 0.65mm Pitch; 6 Pin, 1.25mm W X 2.00mm L X 1.10mm H body, IPC Medium Density", Part Description="Fivefold ESD Protection Diode Arrays (30kV)", Part Number=PESD3V3L5UY, Pin Count=6, PressFit=No, Sense=No, SMD=Yes, Socket=No
D7: "Schottky Diode", Case=SOD-323, Manufacturer=INFINEON, Power=750mA, Voltage=40V, Author="CERN DEM JLC", Bonding=No, Component Type=Standard, ComponentHeight=1.1mm, CreateDate=12.11.2014, Device=BAT165, HelpURL=\\cern.ch\dfs\Applications\Altium\Datasheets\BAT165.pdf, LatestRevisionDate=12.11.2014, Manufacturer Part Number=BAT165, Mounted=Yes, PackageDescription="Small Outline Diode (SOD-323), 1.70mm W X 1.25mm L X 1.10mm H body,  IPC Medium Density", Part Description="Medium Power AF Schottky Diode", Part Number=BAT165, Pin Count=2, PressFit=No, Sense=No, SMD=Yes, Socket=No
D11: "Zener Diode", Case=DO-214AA, Manufacturer="FAIRCHILD SEMICONDUCTOR", Power=600W, Voltage=15V, Author="CERN DEM JLC", Bonding=No, Component Type=Standard, ComponentHeight=2.65mm, CreateDate=08.12.2008, Device=SMBJ15A, HelpURL=\\cern.ch\dfs\Applications\Altium\Datasheets\SMBJ.pdf, LatestRevisionDate=19.12.2011, Manufacturer Part Number=SMBJ15A, Mounted=Yes, PackageDescription="DO-214-AA/SMB Diode, Molded Body; 5.34mm L X 3.625mm W X 2.65mm H, IPC Medium Density", Part Description="Uni-Directional Transient Voltage Suppressor Diode", Part Number=SMBJ15A, Pin Count=2, PressFit=No, Sense=No, SMD=Yes, Socket=No
FL1: library part FIL_MURATA_BNX022-01L, "Block Type EMIFIL (LC Combined)", Manufacturer=MURATA, Manufacturer Part Number=BNX022-01L, Resistance=0.5R, Author="CERN DEM JLC", Component Type=Standard, ComponentHeight=3.3mm, CreateDate=10.10.2012, HelpURL=\\cern.ch\dfs\Applications\Altium\Datasheets\FIL_MURATA_BNX022-01L.pdf, LatestRevisionDate=10.10.2012, Mounted=Yes, Part Description="Block Type EMIFIL (LC Combined) SMD Type, BNX02* Series", Part Number=FIL_MURATA_BNX022-01L, Pin Count=2, Sense=No, SMD=Yes, Socket=No, Status=None
FTG5: library part FIDUCIAL_TARGET_C100-200, "Fiducial Target", Author="CERN DEM JLC", ComponentHeight=0mm, Component Type="Standard (No BOM)", CreateDate=09.02.2010, Family=Fiducial, HelpURL=Undefined, LatestRevisionDate=04.04.2012, Mounted=No, PackageDescription="Round Fiducial Target, Top Layer, 1.0mm, Top Solder 2.0mm, Keepout =2.0mm", Part Description="Round Fiducial Target, Top Layer, 1.0mm, Top Solder 2.0mm, Keepout =2.0mm", Part Number=FIDUCIAL_TARGET_C100-200, Pin Count=1, Sense=No, SMD=Yes, Socket=No, Status=None
FTG6 FTG7 FTG8: library part FIDUCIAL_TARGET_S100-200, "Fiducial Target", Author="CERN DEM JLC", ComponentHeight=0mm, Component Type="Standard (No BOM)", CreateDate=09.02.2010, Family=Fiducial, HelpURL=Undefined, LatestRevisionDate=04.04.2012, Mounted=No, PackageDescription="Square Fiducial Target, Top Layer, 1.0mm, Top Solder 2.0mm, Keepout =2.0mm", Part Description="Square Fiducial Target, Top Layer, 1.0mm, Top Solder 2.0mm, Keepout =2.0mm", Part Number=FIDUCIAL_TARGET_S100-200, Pin Count=1, Sense=No, SMD=Yes, Socket=No, Status=None
IC2 IC4 IC5: library part IFC_FIN1028, "3.3V LVDS 2-Bit High-Speed Differential Reciever", Case=SOIC8, Manufacturer="ON Semiconductor", Author=GK, Bonding=No, ComponentHeight=0.8mm, Component Type=Standard, CreateDate=08/11/2016, Device=FIN1028MX, HelpURL=\\cern.ch\dfs\Applications\Altium\Datasheets\FIN1101K8X.pdf, LatestRevisionDate=08/11/2016, Manufacturer Part Number=FIN1028MX, Mounted=Yes, PackageDescription="SOIC 8, Pitch 1.27mm - Body 4x5mm, IPC Medium Density", Part Description="3.3V LVDS 2-Bit High-Speed Differential Reciever", Part Number=FIN1028MX, Pin Count=8, PressFit=No, Sense=No, SMD=Yes, Socket=No
IC3 IC7: library part IFC_FIN1027A, "3.3V LVDS, 2-Bit, High-Speed, Differential Driver", Case=SOIC8, Manufacturer="ON Semiconductor", Author=GK, Bonding=No, ComponentHeight=0.8mm, Component Type=Standard, CreateDate=08/11/2016, Device=FIN1027AMX, HelpURL=\\cern.ch\dfs\Applications\Altium\Datasheets\FIN1101K8X.pdf, LatestRevisionDate=08/11/2016, Manufacturer Part Number=FIN1027AMX, Mounted=Yes, PackageDescription="SOIC 8, Pitch 1.27mm - Body 4x5mm, IPC Medium Density", Part Description="3.3V LVDS, 2-Bit, High-Speed, Differential Driver", Part Number=FIN1027AMX, Pin Count=8, PressFit=No, Sense=No, SMD=Yes, Socket=No
IC6: "1.7V-5.5V, 2K I2C Serial EEPROM With EUI-48 Node Identity", Case=SOT23-5, Manufacturer="MICROCHIP TECHNOLOGY", Author="CERN DEM MR", Bonding=No, Component Type=Standard, ComponentHeight=1.45mm, CreateDate=31.03.2016, Device=24AA02E48T-I/OT, HelpURL=\\cern.ch\dfs\Applications\Altium\Datasheets\24AA02E48T-I-OT.pdf, LatestRevisionDate=31.03.2016, Manufacturer Part Number=24AA02E48T-I/OT, Mounted=Yes, PackageDescription="SOT, 0.95mm pitch; 5 pin, 1.60mm W X 2.90mm L X 1.45mm H body, IPC Medium Density", Part Description="1.7V-5.5V, 2K I2C Serial EEPROM With EUI-48 Node Identity", Part Number=24AA02E48T-I/OT, Pin Count=5, PressFit=No, Sense=No, SMD=Yes, Socket=No
IC10: "1.7V-5.5V, 2K I2C™ Serial EEPROMs with EUI-48™ Node Identity", Case=SOIC8, Manufacturer="MICROCHIP TECHNOLOGY", Author="CERN DEM MR", Bonding=No, Component Type=Standard, ComponentHeight=1.75mm, CreateDate=19.07.2016, Device=24AA025E48-I/SN, HelpURL=\\cern.ch\dfs\Applications\Altium\Datasheets\24AA025E48-I-SN.pdf, LatestRevisionDate=19.07.2016, Manufacturer Part Number=24AA025E48-I/SN, Mounted=Yes, PackageDescription="SOIC 8, Pitch 1.27mm - Body 4x5mm, IPC Medium Density", Part Description="1.7V-5.5V, 2K I2C™ Serial EEPROMs with EUI-48™ Node Identity", Part Number=24AA025E48-I/SN, Pin Count=8, PressFit=No, Sense=No, SMD=Yes, Socket=No
IC12: Case=TSSOP14, Manufacturer="NXP SEMICONDUCTORS", Author="CERN DEM JLC", Bonding=No, Component Type=Standard, ComponentHeight=1.1mm, CreateDate=19.11.2014, Device=74HC4066PW, HelpURL=\\cern.ch\dfs\Applications\Altium\Datasheets\74HC4066PW.pdf, LatestRevisionDate=19.11.2014, Manufacturer Part Number=74HC4066PW, Mounted=Yes, PackageDescription="SOP, 14-Leads, Body 4.4x5mm (max), Pitch 0.65mm, IPC Medium Density", Part Description="Quad Single-Pole Single-Throw Analog Switch", Part Number=74HC4066PW, Pin Count=14, PressFit=No, Sense=No, SMD=Yes, Socket=No
IC29: "Hex Schmitt-Trigger Inverter", Case=SOIC14, Manufacturer="TEXAS INSTRUMENTS", Author="CERN DEM JMW", Bonding=No, Component Type=Standard, ComponentHeight=1.75mm, CreateDate=29.09.2008, Device=SN74LVC14AD, HelpURL=\\cern.ch\dfs\Applications\Altium\Datasheets\SN74LVC14AD.pdf, LatestRevisionDate=29.09.2008, Manufacturer Part Number=SN74LVC14AD, Mounted=Yes, PackageDescription="SOIC 14, Pitch 1.27mm - Body 4x8.75mm, IPC Medium Density", Part Description="Hex Schmitt-Trigger Inverter", Part Number=SN74LVC14AD, Pin Count=14, PressFit=No, Sense=No, SMD=Yes, Socket=No
IC30: "Digital Temperature Sensor and Thermal Watchdog with Two-Wire Interface", Case=SSOP8, Manufacturer="TEXAS INSTRUMENTS", Author="CERN DEM JLC", Bonding=No, Component Type=Standard, ComponentHeight=1.09mm, CreateDate=15.10.2012, Device=LM75AIMM/NOPB, HelpURL=\\cern.ch\dfs\Applications\Altium\Datasheets\LM75AIMM-NOPB.pdf, LatestRevisionDate=15.10.2012, Manufacturer Part Number=LM75AIMM/NOPB, Mounted=Yes, PackageDescription="SOP, 0.65mm pitch; 8 pin,3.00mm W X 3.00mm L X 1.09mm H bodyI, PC Medium Density", Part Description="-25° to +100°C ±2°C Digital Temperature Sensor and Thermal Watchdog with Two-Wire Interface", Part Number=LM75AIMM/NOPB, Pin Count=8, PressFit=No, Sense=No, SMD=Yes, Socket=No
IC31: "4.2V TO 18V INPUT, 2A LOW IQ SYNCHRONOUS BUCK CONVERTER", Case=SOT23-6, Manufacturer="DIODES INCORPORATED", Author="CERN DEM HF", Bonding=No, Component Type=Standard, ComponentHeight=1.1mm, CreateDate=07.01.2022, Device=AP62201WU-7, HelpURL=\\cern.ch\dfs\Applications\Altium\Datasheets\AP6220x.pdf, LatestRevisionDate=07.01.2022, Manufacturer Part Number=AP62201WU-7, Mounted=Yes, PackageDescription="SOT23, 0.95mm Pitch; 6 Pin, 1.625mm W X 2.90mm L X 1.00mm H body, IPC Medium Density", Part Description="4.2V TO 18V INPUT, 2A LOW IQ SYNCHRONOUS BUCK CONVERTER", Part Number=AP62201WU-7, Pin Count=6, PressFit=No, Sense=No, SMD=Yes, Socket=No
J2: library part 3M_N2530-6002RB, "Connector 30 Male", Manufacturer=3M, Manufacturer Part Number=N2530-6002RB, Author="CERN DEM JLC", ComponentHeight=10.03mm, Component Type=Standard, CreateDate=11.02.2009, Family="Header 30", HelpURL=\\cern.ch\dfs\Applications\Altium\Datasheets\3M_N2530-6002RB.pdf, LatestRevisionDate=11.08.2009, Mounted=Yes, Part Description="30 Contacts - Straight .100'' x .100'' Low Profile Four-Wall Header, 2500 Series", Part Number=3M_N2530-6002RB, Pin Count=30, PressFit=No, Sense=No, SMD=No, Socket=No, Status=None
J5: library part "CON_2x8 2mm male", "2mm  dual row rheader (Maritex)", Manufacturer=Molex, Manufacturer Part Number=87759-1650, Supplier Part Number 1=538-87759-1650, Contact Material="Phosphor Bronze", Contact Plating=Gold, Contact Termination="SMT Vertical", Gender=Header, No. of Contacts=16, No. of Rows=2, Pitch Spacing=2, RoHS=YES, Supplier 1=Mouser
J6: library part AMPHENOL_10052825-101LF, "72 Contacts Header, 6 Columns, 4 Pairs per Column", Manufacturer=AMPHENOL, Manufacturer Part Number=10052825-101LF, Author="CERN DEM MR", ClassName=Overlapping, ComponentHeight=15.35mm, ComponentLink1Description=Application, ComponentLink1URL=\\cern.ch\dfs\Applications\Altium\Datasheets\AMPHENOL_10052825-101LF_Application.pdf, Component Type=Standard, CreateDate=19/02/2018, Family="AirMax VS", HelpURL=\\cern.ch\dfs\Applications\Altium\Datasheets\AMPHENOL_10052825-101LF.pdf, LatestRevisionDate=19/02/2018, Mounted=Yes, Part Description="72 Contacts, 2mm Pitch, 6 Columns, 4 Pairs per Column, 4 Walls, Right Angle Header", Part Number=AMPHENOL_10052825-101LF, Pin Count=72, PressFit=Yes, Sense=No, SMD=No, Socket=No, Status=None
J8 J9: library part AMPHENOL_919-383J-51A, Manufacturer=AMPHENOL, Manufacturer Part Number=919-383J-51A, Author="CERN DEM BC", Component Type=Standard, ComponentHeight=6mm, CreateDate=31.01.2019, Family=MCX, HelpURL=\\cern.ch\dfs\Applications\Altium\Datasheets\AMPHENOL_919-383J-51A.pdf, LatestRevisionDate=31.01.2019, Mounted=Yes, Part Description="50 Ohm, RF Connector, MCX Right Angle PCB Receptacle Jack", Part Number=AMPHENOL_919-383J-51A, Pin Count=5, PressFit=No, Sense=No, SMD=No, Socket=No, Status=None
J10: library part CON_DC_5A_THT_RA, "24V /3. 5A, 2.1mm Diameter Pin, SMD DC Power Supply Connector With  Break Contact", Manufacturer=SWITCHCRAFT, Manufacturer Part Number=L712RA, Part Number=SWITCHCRAFT_L712RA, Author=GK, Component Type=Standard, ComponentHeight=11mm, CreateDate=15.02.2011, Family=Jack, HelpURL=\\cern.ch\dfs\Applications\Altium\Datasheets\LUMBERG_161314.pdf, LatestRevisionDate=20.07.2011, Mounted=Yes, Part Description="12V/5A, 2.5mm Diameter Pin, THT DC Power Supply Connector With  Break Contact", Pin Count=3, PressFit=No, Sense=No, SMD=No, Socket=No, Status=None
L4: library part IND_3.3UH_30%_WURTH_WE-TPC_744043003, "Inductor With Core", Manufacturer="WURTH ELEKTRONIK", Manufacturer Part Number=744043003, Power=2.15A, Resistance=0.03R, Tolerance=±30%, Author="CERN DEM JLC", Component Type=Standard, ComponentHeight=3mm, CreateDate=12.07.2011, HelpURL=\\cern.ch\dfs\Applications\Altium\Datasheets\IND_WURTH_WE-TPC_744043003.pdf, LatestRevisionDate=24.01.2012, Mounted=Yes, Part Description="Shielded Tiny Power Inductor (WE-TPC Serie)", Part Number=IND_3.3UH_30%_WURTH_WE-TPC_744043003, Pin Count=2, Sense=No, SMD=Yes, Socket=No
LD5 LD6 LD8 LD9: library part LED_DIALIGHT_555-2301F, "LED Green 1C 2A", Manufacturer=DIALIGHT, Manufacturer Part Number=555-2301F, Author="CERN DEM JMW", Bonding=No, Color=Green, Component Type=Standard, ComponentHeight=6.35mm, CreateDate=22.09.2008, HelpURL=\\cern.ch\dfs\Applications\Altium\Datasheets\LED_DIALIGHT_555-2301F.pdf, LatestRevisionDate=17.03.2010, Mounted=Yes, PackageDescription="Single 2mm Green LED, Body 5.08x2.54mm, Pin spacing 2.54mm", Part Description="Single 2mm Green LED CBI® Circuit Board Indicator", Part Number=LED_DIALIGHT_555-2301F, Pin Count=2, PressFit=No, Sense=No, SMD=No, Socket=No
LD7: library part LED_DIALIGHT_555-2001F, "LED Red 1C 2A", Manufacturer=DIALIGHT, Manufacturer Part Number=555-2001F, Author="CERN DEM JMW", Bonding=No, Color=Red, Component Type=Standard, ComponentHeight=6.35mm, CreateDate=22.09.2008, HelpURL=\\cern.ch\dfs\Applications\Altium\Datasheets\LED_DIALIGHT_555-2001F.pdf, LatestRevisionDate=17.03.2010, Mounted=Yes, PackageDescription="Single 2mm Red LED, Body 5.08x2.54mm, Pin spacing 2.54mm", Part Description="Single 2mm Red LED CBI® Circuit Board Indicator", Part Number=LED_DIALIGHT_555-2001F, Pin Count=2, PressFit=No, Sense=No, SMD=No, Socket=No
LD10 LD11: library part LED_KINGBRIGHT_KPH-1608CGCK, "LED Green 1C 2A", Manufacturer=KINGBRIGHT, Manufacturer Part Number=KPH-1608CGCK, Author="CERN DEM JLC", Bonding=No, Color=Green, Component Type=Standard, ComponentHeight=0.65mm, CreateDate=03/07/2017, HelpURL=\\cern.ch\dfs\Applications\Altium\Datasheets\LED_KINGBRIGHT_KPH-1608CGCK.pdf, LatestRevisionDate=03/07/2017, Mounted=Yes, PackageDescription="SMT Green LED, Case 0603, Body L 1.6 x W 0.8mm H 0.65mm", Part Description="SMD Green LED, Case 1.6mmX0.8mm(0603), 0.65mm Thickness", Part Number=LED_KINGBRIGHT_KPH-1608CGCK, Pin Count=2, PressFit=No, Sense=No, SMD=Yes, Socket=No
MECH1 MECH2 MECH3: library part Generic_mechanical, "SHV connector", Manufacturer=Radiall, Author=GK, Component Type=Standard, ComponentHeight=generic, CreateDate=28.10.2019, LatestRevisionDate=28.10.2019, Manufacturer Part Number=R317580000, Mounted=Yes, PackageDescription=SHV, Part Description="SHV panel connector", Part Number=R317580000, Pin Count=0, PressFit=No, Sense=No, SMD=No, Socket=No, Status=None
R7 R8 R9 R10 R11 R12 R13 R14 R15 R16 R18 R19 R116: library part R0402_100R_1%_0.0625W_100PPM, "Resistor - 1%", Case=0402, Manufacturer=GENERIC, Manufacturer1 ComponentHeight=0.4mm, Manufacturer1 Example="YAGEO PHYCOMP", Manufacturer1 Part Number=232270671001L, Power=0.0625W, Tolerance=±1%, Author="CERN DEM JLC", Component Type=Standard, CreateDate=03.12.2007, HelpURL=\\cern.ch\dfs\Applications\Altium\Datasheets\R0402_Phycomp_RC0402.pdf, LatestRevisionDate=17.10.2012, Manufacturer Part Number=R0402_100R_1%_0.0625W_100PPM, Mounted=Yes, Part Description="General Purpose Thick Film Chip Resistor", Part Number=R0402_100R_1%_0.0625W_100PPM, Pin Count=2, PressFit=No, Sense=No, SMD=Yes, Socket=No, Status="Not Recommended", TC=±100ppm/°C
R17: library part R0402_1K_1%_0.0625W_100PPM, "Resistor - 1%", Case=0402, Manufacturer=GENERIC, Manufacturer1 ComponentHeight=0.4mm, Manufacturer1 Example="YAGEO PHYCOMP", Manufacturer1 Part Number=232270671002L, Power=0.0625W, Tolerance=±1%, Author="CERN DEM JLC", Component Type=Standard, CreateDate=2007-12-03, HelpURL=\\cern.ch\dfs\Applications\Altium\Datasheets\R0402_Phycomp_RC0402.pdf, LatestRevisionDate=2012-10-17, Manufacturer Part Number=R0402_1K_1%_0.0625W_100PPM, Mounted=Yes, Part Description="General Purpose Thick Film Chip Resistor", Part Number=R0402_1K_1%_0.0625W_100PPM, Pin Count=2, Sense=No, SMD=Yes, Socket=No, Status="Not recommended", TC=±100ppm/°C
R31 R34 R35 R36 R37 R38 R39 R40 R41 R42 R43 R44 R45 R46 R47 R48 R126 R127 R128: library part R0402_0R_JUMPER, "Resistor", Case=0402, Manufacturer=GENERIC, Manufacturer1 ComponentHeight=0.4mm, Manufacturer1 Example="YAGEO PHYCOMP", Manufacturer1 Part Number=232270591001L, Author="CERN DEM JLC", Component Type=Standard, CreateDate=03.12.2007, HelpURL=\\cern.ch\dfs\Applications\Altium\Datasheets\R0402_Phycomp_RC0402.pdf, LatestRevisionDate=17.10.2012, Manufacturer Part Number=R0402_0R_JUMPER, Mounted=Yes, Part Description="1A (0.05R Max DC Resistance) Zero Ohm Jumper", Part Number=R0402_0R_JUMPER, Pin Count=2, Sense=No, SMD=Yes, Socket=No
  R31 R34 R35 R36 R37 R38 R39 R40 R41 R42 R43 R44 R45 R46 R47 R48: PressFit=No, Status="Not Recommended"
  R126 R127 R128: Status="Not recommended"
R50: library part R0402_200R_1%_0.0625W_100PPM, "Resistor - 1%", Case=0402, Manufacturer=GENERIC, Manufacturer1 ComponentHeight=0.4mm, Manufacturer1 Example="YAGEO PHYCOMP", Manufacturer1 Part Number=232270672001L, Power=0.0625W, Tolerance=±1%, Author="CERN DEM JLC", Component Type=Standard, CreateDate=2007-12-03, HelpURL=\\cern.ch\dfs\Applications\Altium\Datasheets\R0402_Phycomp_RC0402.pdf, LatestRevisionDate=2012-10-17, Manufacturer Part Number=R0402_200R_1%_0.0625W_100PPM, Mounted=Yes, Part Description="General Purpose Thick Film Chip Resistor", Part Number=R0402_200R_1%_0.0625W_100PPM, Pin Count=2, PressFit=No, Sense=No, SMD=Yes, Socket=No, Status="Not Recommended", TC=±100ppm/°C
R51 R52 R53 R54 R55: library part R0402_22R_1%_0.0625W_100PPM, "Resistor - 1%", Case=0402, Manufacturer=GENERIC, Manufacturer1 ComponentHeight=0.4mm, Manufacturer1 Example="YAGEO PHYCOMP", Manufacturer1 Part Number=232270672209L, Power=0.0625W, Tolerance=±1%, Author="CERN DEM JLC", Component Type=Standard, CreateDate=03.12.2007, HelpURL=\\cern.ch\dfs\Applications\Altium\Datasheets\R0402_Phycomp_RC0402.pdf, LatestRevisionDate=17.10.2012, Manufacturer Part Number=R0402_22R_1%_0.0625W_100PPM, Mounted=Yes, Part Description="General Purpose Thick Film Chip Resistor", Part Number=R0402_22R_1%_0.0625W_100PPM, Pin Count=2, PressFit=No, Sense=No, SMD=Yes, Socket=No, Status="Not Recommended", TC=±100ppm/°C
R64 R65 R114 R122 R123 R124 R125 R131 R134 R136: library part R0402_10K_1%_0.0625W_100PPM, "Resistor - 1%", Case=0402, Manufacturer=GENERIC, Manufacturer1 ComponentHeight=0.4mm, Manufacturer1 Example="YAGEO PHYCOMP", Manufacturer1 Part Number=232270671003L, Power=0.0625W, Tolerance=±1%, Author="CERN DEM JLC", Component Type=Standard, HelpURL=\\cern.ch\dfs\Applications\Altium\Datasheets\R0402_Phycomp_RC0402.pdf, Manufacturer Part Number=R0402_10K_1%_0.0625W_100PPM, Mounted=Yes, Part Description="General Purpose Thick Film Chip Resistor", Part Number=R0402_10K_1%_0.0625W_100PPM, Pin Count=2, Sense=No, SMD=Yes, Socket=No, TC=±100ppm/°C
  R64 R65: CreateDate=2007-12-03, LatestRevisionDate=2012-10-17, PressFit=No, Status="Not Recommended"
  R114 R136: CreateDate=03.12.2007, LatestRevisionDate=17.10.2012, Status="Not recommended"
  R122 R123 R124 R125 R131: CreateDate=03.12.2007, LatestRevisionDate=17.10.2012, PressFit=No, Status="Not Recommended"
  R134: CreateDate=2007-12-03, LatestRevisionDate=2012-10-17, Status="Not recommended"
R110 R111 R112 R113 R115: library part R0402_51R_1%_0.0625W_100PPM, "Resistor - 1%", Case=0402, Manufacturer=GENERIC, Manufacturer1 ComponentHeight=0.4mm, Manufacturer1 Example="YAGEO PHYCOMP", Manufacturer1 Part Number=232270675109L, Power=0.0625W, Tolerance=±1%, Author="CERN DEM JLC", Component Type=Standard, HelpURL=\\cern.ch\dfs\Applications\Altium\Datasheets\R0402_Phycomp_RC0402.pdf, Manufacturer Part Number=R0402_51R_1%_0.0625W_100PPM, Mounted=Yes, Part Description="General Purpose Thick Film Chip Resistor", Part Number=R0402_51R_1%_0.0625W_100PPM, Pin Count=2, PressFit=No, Sense=No, SMD=Yes, Socket=No, Status="Not Recommended", TC=±100ppm/°C
  R110 R112 R113 R115: CreateDate=03/12/2007, LatestRevisionDate=17/10/2012
  R111: CreateDate=03.12.2007, LatestRevisionDate=17.10.2012